# Altium PCB C口分离模块.pcbdoc
Units mil, origin at the board's own origin, x right, y up, seen from the top; angles counter-clockwise.
Board outline 1500 x 1200 mil, 2 copper layers (Top Layer, Bottom Layer); 1 components, 5 nets, 28 pads, 0 vias.
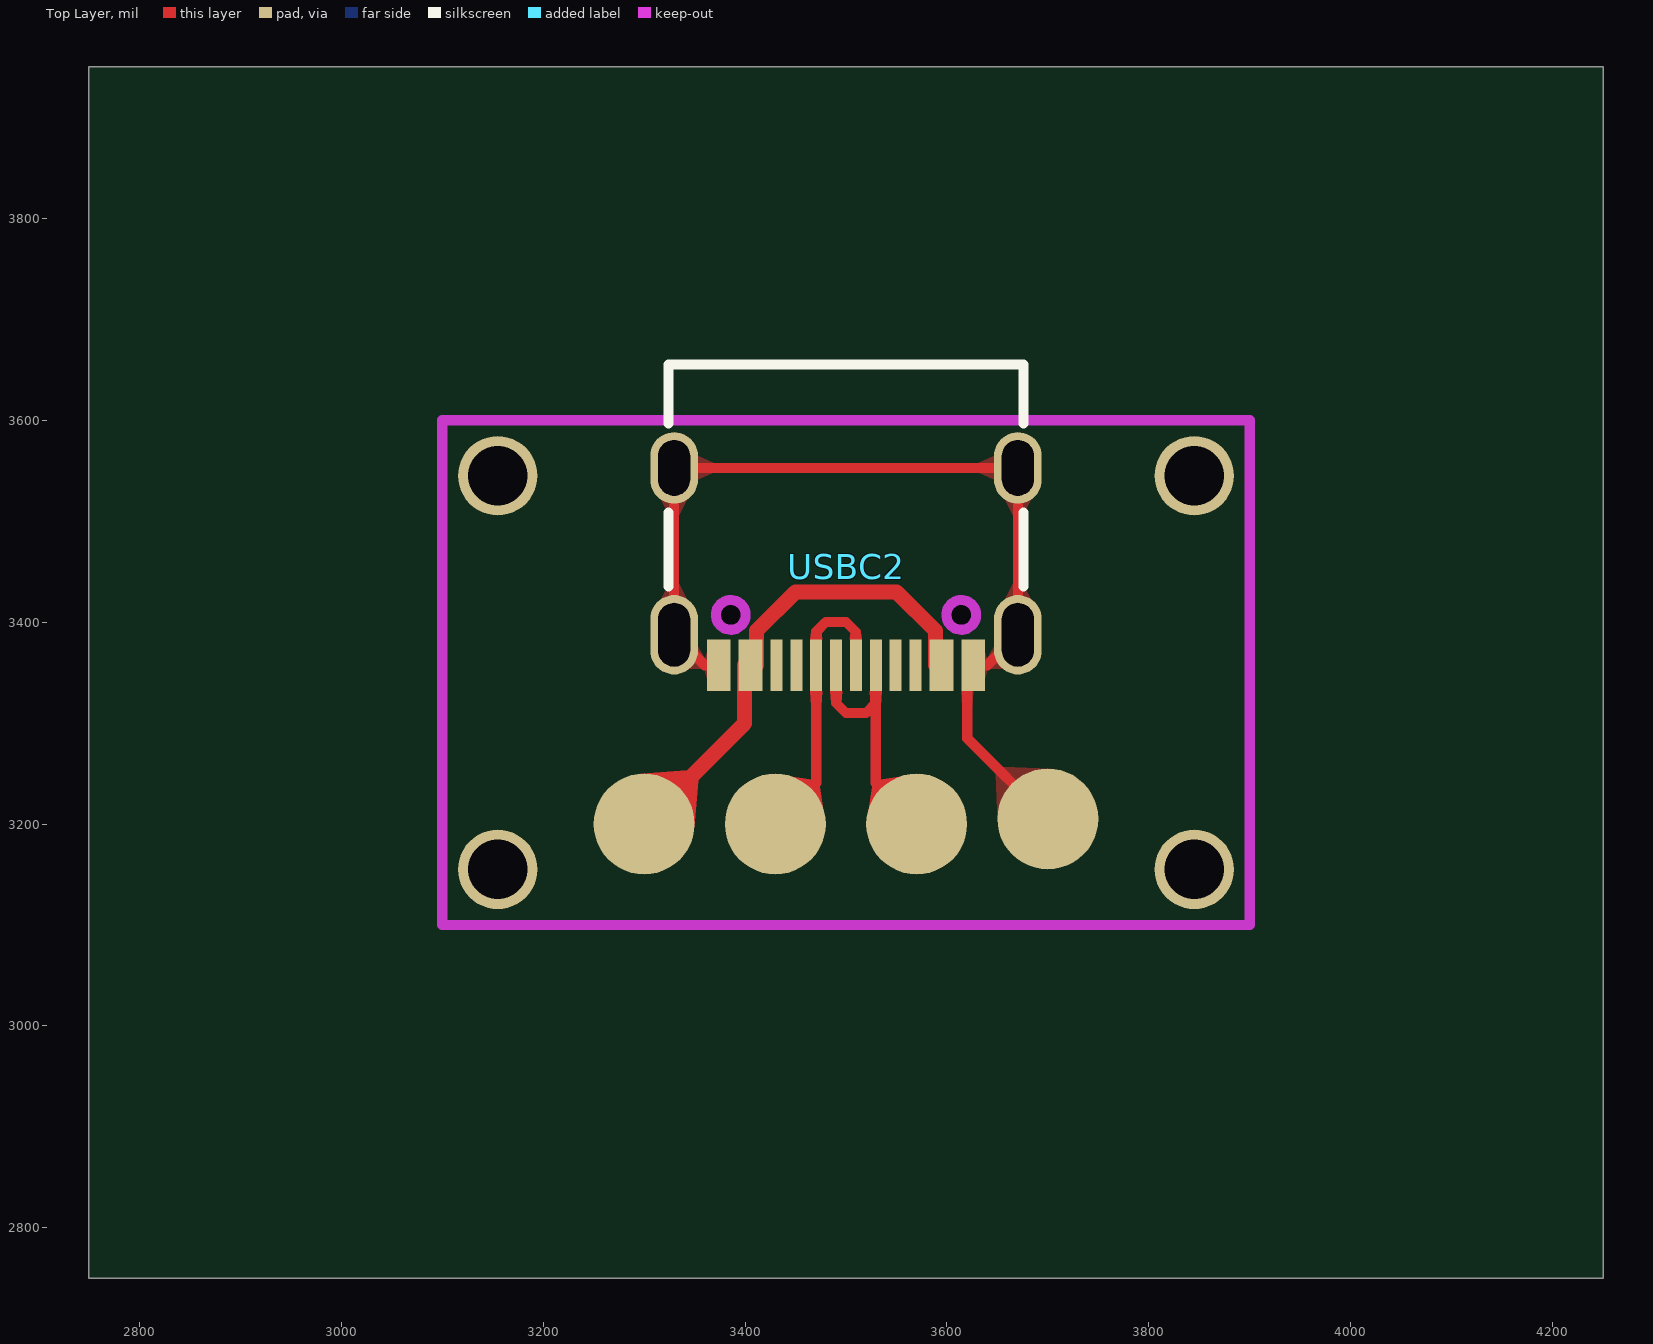
[diagram p0: Top Layer view]
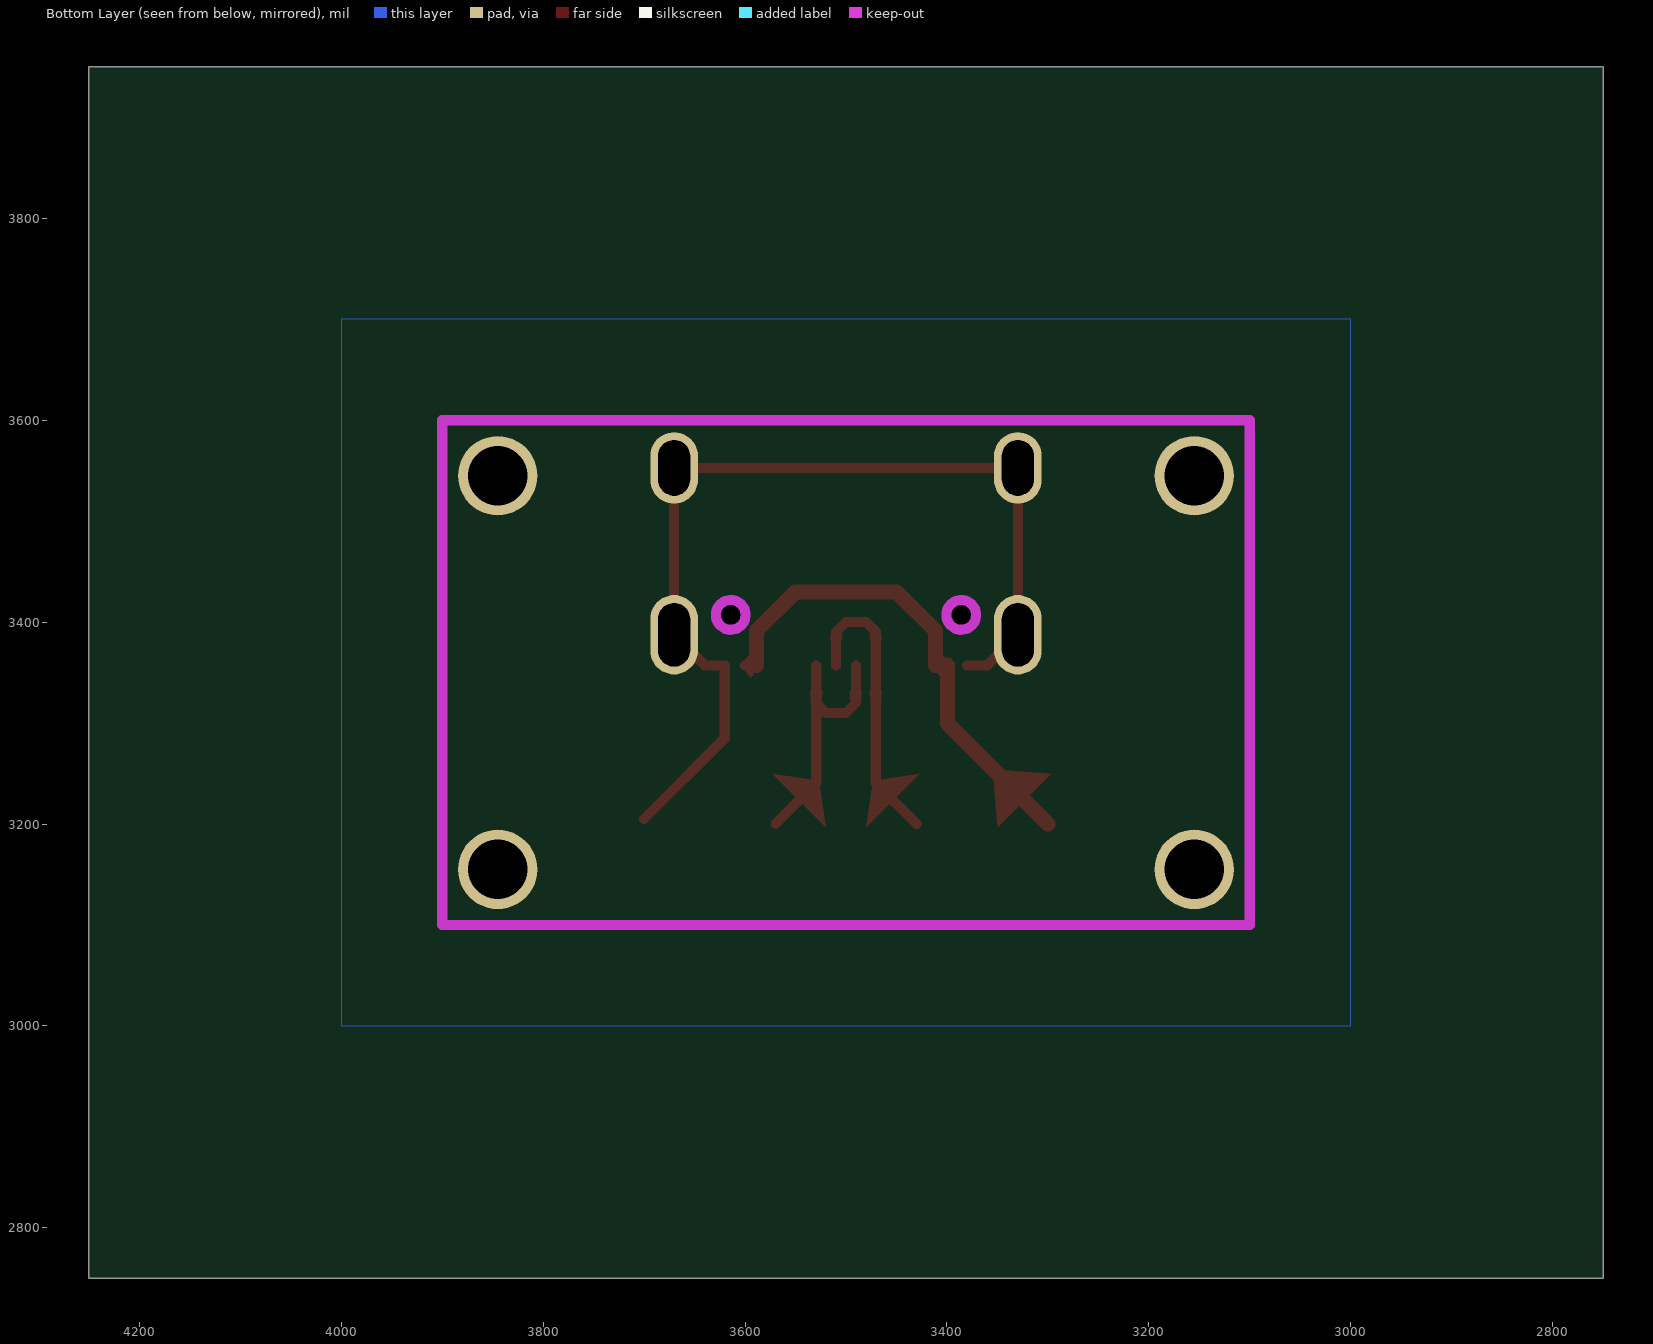
[diagram p1: Bottom Layer view, seen from below]

## Layer stack, top to bottom
Top Layer: signal copper (thickness not stored)
Dielectric: dielectric 12.6, FR-4, Dk 4.8
Bottom Layer: signal copper (thickness not stored)

## Board outline
4250,2750 2750,2750 2750,3950 4250,3950

## Components (designator, comment, footprint, x,y, rotation, side; value= is the part's Value field where it differs from the comment)
USBC2 "TYPE-C-31-M-12" USB-C_SMD-TYPE-C-31-M-12 3500,3455 r180 top

## Footprints (in the part's own frame and the unit in brackets; to place one, negate y for a bottom-side part, rotate by r counter-clockwise, add the part's x,y. Pads: shape width x height; smd on the part's side, far side on the other; paste and mask are expansions set on the pad)
USB-C_SMD-TYPE-C-31-M-12 [mm]
  oval 1.2x1.8 hole 0.8 slot 1.4 at 90 deg: 0(4.325,-2.484) 3(-4.325,-2.484)
  oval 1.2x2 hole 0.8 slot 1.6 at 90 deg: 1(4.325,1.716) 2(-4.325,1.716)
  rect 0.3x1.3 smd: A1(-3.35,2.484) A4(-2.55,2.484) A5(-1.25,2.484) A6(-0.25,2.484) A7(0.25,2.484) A8(1.25,2.484) A9(2.55,2.484) A12(3.35,2.484) B1(3.05,2.484) B4(2.25,2.484) B5(1.75,2.484) B6(0.75,2.484) B7(-0.75,2.484) B8(-1.75,2.484) B9(-2.25,2.484) B12(-3.05,2.484)
  Multi-Layer board cut-out: -3.275,1.216 -3.223,1.031 -3.086,0.896 -2.9,0.847 -2.714,0.896 -2.577,1.031 -2.525,1.216 -2.525,1.216 -2.577,1.401 -2.714,1.535 -2.9,1.584 -3.086,1.535 -3.223,1.401 -3.275,1.216
  Multi-Layer board cut-out: 2.525,1.216 2.577,1.031 2.714,0.896 2.9,0.847 3.086,0.896 3.223,1.031 3.275,1.216 3.275,1.216 3.223,1.401 3.086,1.535 2.9,1.584 2.714,1.535 2.577,1.401 2.525,1.216
  silkscreen extent -4.47,-5.08 4.47,0.5

## Free pads (board coordinates)
  round 100 smd: 1(3300,3200) 1(3700,3205) 2(3570,3200) 3(3430,3200)
  round 78.74 hole 59.06: 4(3155,3545) 5(3845,3545) 6(3155,3155) 7(3845,3155)

## Nets (pads, with @x,y where several pads share a name; then routed paths per layer and width w, separated by ;. In a path a pad name is that pad's centre, name@x,y a point inside that pad or via, vN(x,y) a via of type N, cw(c..) or ccw(c..) an arc to the next point about the centre after c; other vN are vias at no path point)
D+: pad.3 USBC2.A6 USBC2.B6 | length 287.6
  Top Layer w10: pad.3 3470.5,3240.5 USBC2.B6 3470.5,3390.5 3480,3400 3500,3400 3509.8,3390.2 USBC2.A6
D-: pad.2 USBC2.A7 USBC2.B7 | length 296.4
  Top Layer w10: USBC2.A7 3490.2,3319.8 3500,3310 3520,3310 3529.5,3319.5 USBC2.B7 3529.5,3240.5 pad.2
GND: pad.1@3700,3205 USBC2.0 USBC2.1 USBC2.2 USBC2.3 USBC2.A1 USBC2.A12 USBC2.B1 USBC2.B12 | length 982
  Top Layer w10: USBC2.B1 USBC2.A12 3360,3357.2 USBC2.1 USBC2.0 USBC2.3 USBC2.2 3640,3357.2 USBC2.A1 USBC2.B12 3620.1,3284.9 pad.1@3700,3205
VBUS: pad.1@3300,3200 USBC2.A4 USBC2.A9 USBC2.B4 USBC2.B9 | length 499.6
  Top Layer w10: USBC2.A9 USBC2.B4 ; USBC2.B9 USBC2.A4
  Top Layer w15: pad.1@3300,3200 3399.6,3299.6 USBC2.A9 ; USBC2.B4 3411.4,3391.4 3450,3430 3550,3430 3588.6,3391.4 USBC2.B9
"": pad.4 pad.5 pad.6 pad.7 USBC2.A5 USBC2.A8 USBC2.B5 USBC2.B8

## Polygon pours and split planes (outlines as drawn)
GND on Top Layer (hatched 45Degree grid 30 track 10, pour order 0): 3000,3700 4000,3700 4000,3000 3000,3000
GND on Bottom Layer (hatched 45Degree grid 30 track 10, pour order 4): 3000,3700 4000,3700 4000,3000 3000,3000

## Keep-outs
Board Outline Layer:
  lines w10 net "": 3100,3100 3205,3100 3900,3100 3900,3600 3100,3600 3100,3100
Multi-Layer:
  circle w10: c3614.17,3407.14 r14.76
  circle w10: c3385.83,3407.14 r14.76

## Other copper
Top Layer:
  region net D-: 3573.13,3249.9 3533.06,3244.01 3525.99,3236.94 3520.1,3196.87
  region net D+: 3479.9,3196.87 3474.01,3236.94 3466.94,3244.01 3426.87,3249.9
  region net VBUS: 3349.9,3196.87 3353.44,3242.83 3342.83,3253.44 3296.87,3249.9
  region net D-: 3535.43,3331.6 3523.62,3331.6 3524.53,3316.6 3534.53,3316.6
  region net D-: 3535.43,3331.6 3523.62,3331.6 3524.53,3319.53 3534.53,3319.53
  region net D+: 3503.93,3382.79 3515.74,3382.79 3514.84,3390.16 3504.84,3390.16
  region net D-: 3496.06,3331.6 3484.25,3331.6 3485.16,3319.84 3495.16,3319.84
  region net D+: 3476.37,3331.61 3464.56,3331.61 3465.47,3316.61 3475.47,3316.61
  region net D+: 3464.56,3382.79 3476.37,3382.79 3475.47,3390.47 3465.47,3390.47
  region net VBUS: 3594.48,3344.7 3594.48,3369.7 3588.58,3362.2 3588.58,3352.2
  region net VBUS: 3594.49,3369.7 3594.49,3344.7 3600.39,3352.2 3600.39,3362.2
  region net VBUS: 3405.51,3344.7 3405.51,3369.7 3399.6,3362.2 3399.6,3352.2
  region net VBUS: 3405.51,3369.7 3405.51,3344.7 3411.42,3352.2 3411.42,3362.2